# EAGLE board vga_ambilight_throughhole (EAGLE 6.1)
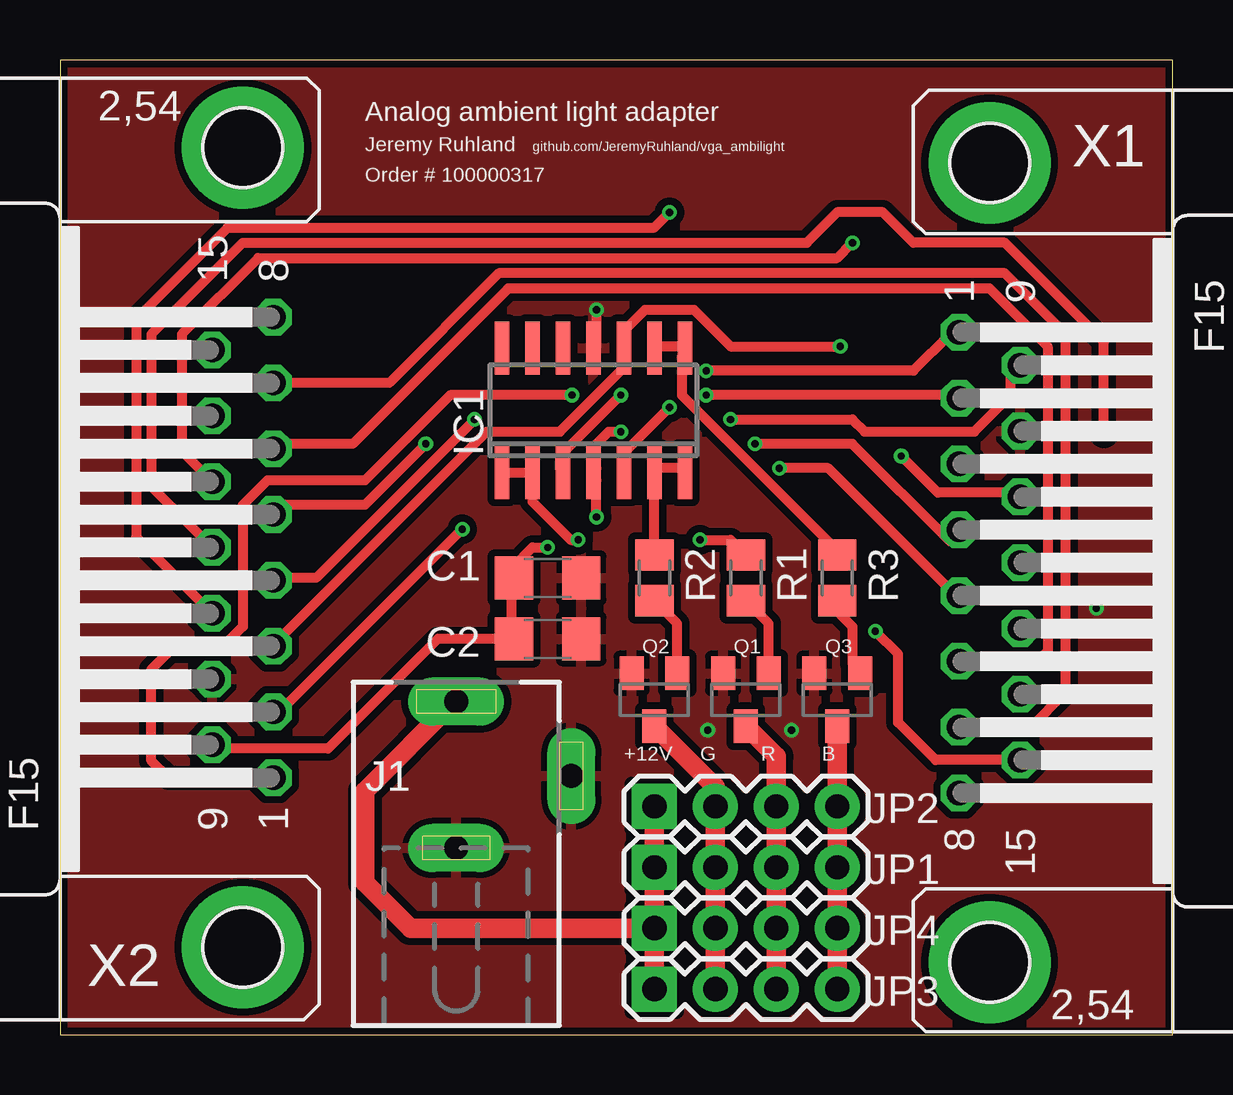
[diagram p0: board, top side]
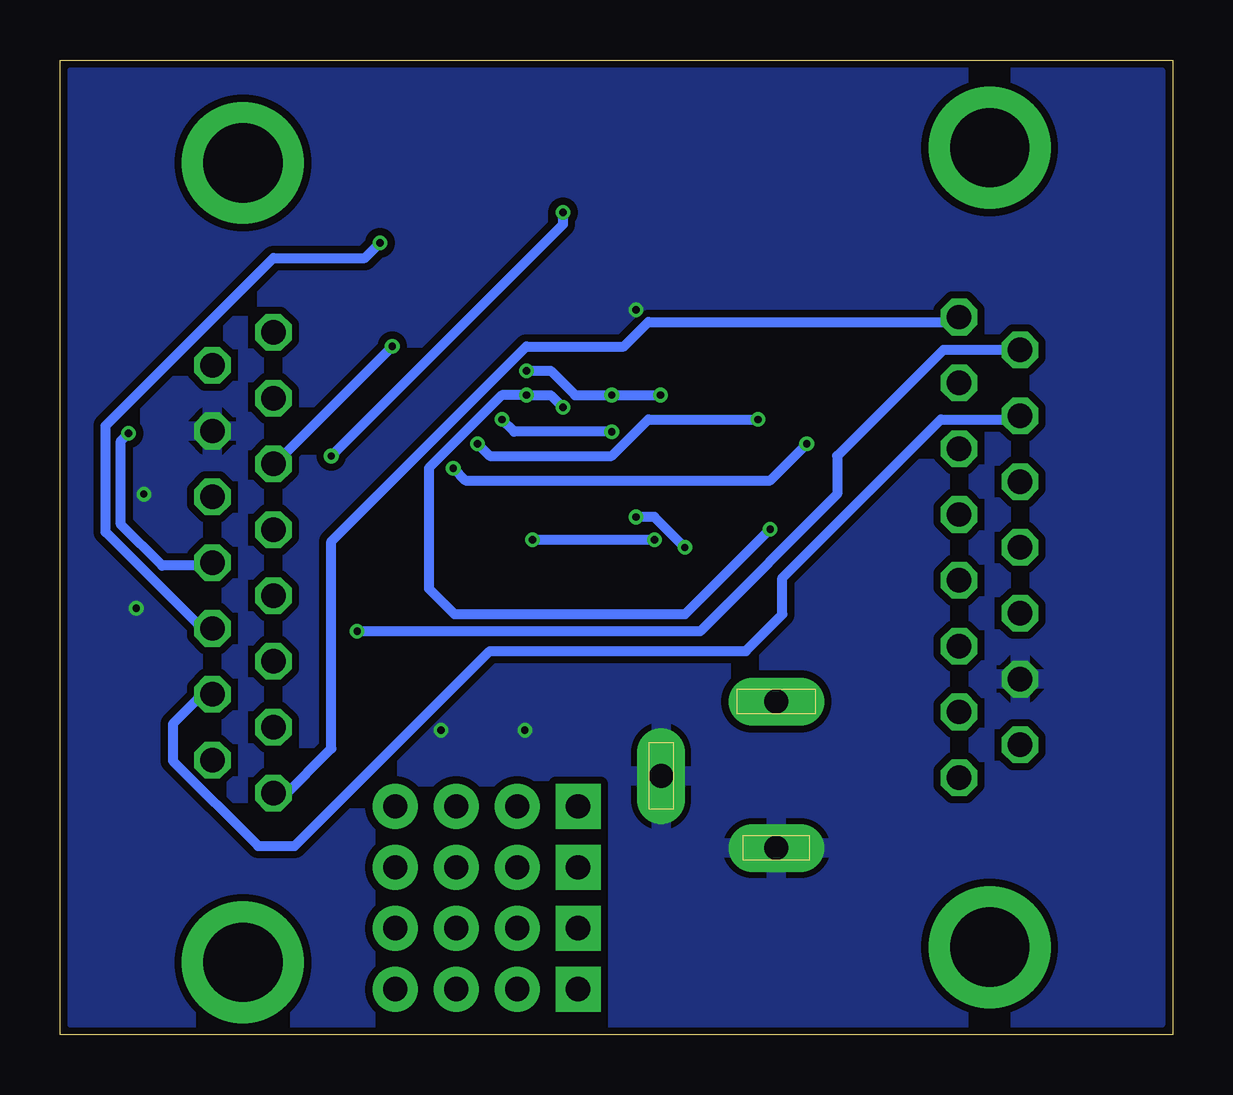
[diagram p1: board, bottom side, seen from below]

Size 46.35 x 40.64 mm. Coordinates in mm from the lower left corner, seen from the top.
Outline: 46.35,40.64 0,40.64 0,0 46.35,0 46.35,40.64
Copper layers (1*16): Top 0.035mm / dielectric 1.5mm / Bottom 0.035mm
Design rules: minimum track width 6mil, minimum drill 12mil, track to track 6mil, track to pad 6mil, pad to pad 6mil, via to via 6mil, smd to smd 0mil, copper to edge 10mil, drill to drill 10mil, minimum pad ring 10mil, minimum via ring 6mil, stop-mask expansion 2mil, vias tented up to drill 100mil, thermal gap 10mil

## Footprints (pad centres in the part's own frame; a part is rotated, then mirrored left to right if it is on the bottom)
C1206 = smd 1.6 x 1.8: 1 -1.4,0; 2 1.4,0
SO14 = smd 0.6 x 2.2: 1 -3.81,-2.6; 2 -2.54,-2.6; 3 -1.27,-2.6; 4 0,-2.6; 5 1.27,-2.6; 6 2.54,-2.6; 7 3.81,-2.6; 8 3.81,2.6; 9 2.54,2.6; 10 1.27,2.6; 11 0,2.6; 12 -1.27,2.6; 13 -2.54,2.6; 14 -3.81,2.6
DCJ0303 = drill 1 pad 2 long: 1 0,3.1; 2 4.8,0; 3 0,-3
1X04 = drill 1.016 pad 1.88 square: 1 0,0 | drill 1.016 pad 1.88: 2 2.54,0; 3 5.08,0; 4 7.62,0
SOT23 = smd 1 x 1.4: 1 -0.95,-1.1; 2 0.95,-1.1; 3 0,1.1
M0805 = smd 1.3 x 1.6: 1 -0.95,0; 2 0.95,0
F15HP = drill 1.016 octagon: 1 -9.601,-1.27; 2 -6.858,-1.27; 3 -4.115,-1.27; 4 -1.372,-1.27; 5 1.372,-1.27; 6 4.115,-1.27; 7 6.858,-1.27; 8 9.601,-1.27; 9 -8.23,1.27; 10 -5.486,1.27; 11 -2.743,1.27; 12 0,1.27; 13 2.743,1.27; 14 5.486,1.27; 15 8.23,1.27 | drill 3.302 pad 5.08: G1 -16.662,0; G2 16.662,0

## Placement (x,y rotation side)
C1  10uf  [C1206]  20.32,19.05 0 top
C2  0.1uf  [C1206]  20.32,16.51 0 top
IC1  QUAD_OPAMPD  [SO14]  22.22,26.04 0 top
J1  [DCJ0303]  16.51,10.8 0 top
JP1  [1X04]  24.77,6.98 0 top
JP2  [1X04]  24.77,9.53 0 top
JP3  [1X04]  24.77,1.91 0 top
JP4  [1X04]  24.77,4.45 0 top
Q1  [SOT23]  28.57,13.97 180 top
Q2  [SOT23]  24.77,13.97 180 top
Q3  [SOT23]  32.38,13.97 180 top
R1  [M0805]  28.57,19.05 270 top
R2  [M0805]  24.77,19.05 270 top
R3  [M0805]  32.38,19.05 270 top
X1  [F15HP]  38.73,19.69 270 top
X2  [F15HP]  7.62,20.32 90 top

## Library data of the parts
C1 C2 IC1 Q1-Q3 R1-R3 X1 X2 = adafruit
J1 = con-jack; OC_FARNELL: unknown; OC_NEWARK: unknown
JP1-JP4 = sparkfun

## Nets
+12V: J1.1 JP1.1 JP2.1 JP3.1 JP4.1
B: IC1.10 X1.3 X2.3
B_PWR: JP1.4 JP2.4 JP3.4 JP4.4 Q3.3
G: IC1.5 X1.2 X2.2
G_PWR: JP1.2 JP2.2 JP3.2 JP4.2 Q2.3
GND: C1.2 C2.2 IC1.11 J1.2 J1.3 Q1.2 Q2.2 Q3.2 X1.10 X2.10
N$1: X1.4 X2.4
N$2: X1.5 X2.5
N$3: X1.6 X2.6
N$4: X1.7 X2.7
N$5: X1.8 X2.8
N$6: IC1.8 IC1.9 R3.1
N$7: IC1.6 IC1.7 R2.1
N$8: IC1.1 IC1.2 R1.1
N$9: X1.15 X2.15
N$10: X1.14 X2.14
N$11: X1.13 X2.13
N$12: Q1.1 R1.2
N$13: Q2.1 R2.2
N$14: X1.11 X2.11
N$15: X1.12 X2.12
N$16: Q3.1 R3.2
R: IC1.3 X1.1 X2.1
R_PWR: JP1.3 JP2.3 JP3.3 JP4.3 Q1.3
VCC: C1.1 C2.1 IC1.4 X1.9 X2.9

## Tracks (layer width: path | path; a pad name or v marks a point on that pad's centre or on a via)
+12V
  Top 0.813: JP3.1 JP4.1 | JP2.1 JP1.1 JP4.1 | J1.1 16.43,13.9 12.7,10.16 12.7,6.35 14.61,4.45 JP4.1
B  (via drill 0.3)
  Top 0.406: X2.3 9.14,16.51 17.78,25.15 20.83,25.15 23.49,27.81 IC1.10 23.49,29.34 24.38,30.23 26.42,30.23 27.94,28.7 v32.51,28.7
  Bottom 0.406: v32.51,28.7 37.08,24.13 X1.3
B_PWR
  Top 0.813: JP3.4 JP4.4 JP1.4 JP2.4 Q3.3
G  (via drill 0.3)
  Top 0.406: v26.92,26.67 37.08,26.67 X1.2 | v16.76,21.08 9.14,13.46 X2.2 | v25.4,26.16 23.49,24.26 IC1.5
  Bottom 0.406: v25.4,26.16 25.91,26.67 v26.92,26.67 27.94,26.67 30.99,23.62 30.99,18.61 29.91,17.53 20.32,17.53 v16.76,21.08
G_PWR
  Top 0.813: JP3.2 JP4.2 JP1.2 JP2.2 27.3,10.33 Q2.3
GND  (via drill 0.3)
  Top 0.406: 21.84,19.05 C1.2 | v22.35,30.23 22.35,28.7 IC1.11
  other vias: 30.48,12.7 26.99,12.7 42.86,22.54 43.18,17.78
  pour Bottom (isolate 0.305): 45.72,0.64 0.64,0.64 0.64,40.01 45.72,40.01
  pour Top (isolate 0.305): 0,40.64 46.35,40.64 46.35,0 0,0
N$1  (via drill 0.3)
  Top 0.406: v17.27,25.65 10.67,19.05 9.14,19.05 X2.4 | v28.96,24.64 33.02,24.64 37.08,20.57 X1.4
  Bottom 0.406: v17.27,25.65 21.84,25.65 23.37,24.13 28.45,24.13 v28.96,24.64
N$2  (via drill 0.3)
  Top 0.406: v15.24,24.64 12.7,22.1 9.14,22.1 X2.5 | v29.97,23.62 32,23.62 37.08,18.54 X1.5
  Bottom 0.406: v15.24,24.64 16.76,23.11 29.46,23.11 v29.97,23.62
N$3
  Top 0.406: X2.6 9.14,24.64 12.19,24.64 18.67,31.12 38.73,31.12 41.15,28.7 41.15,16 40.64,15.49 37.59,15.49 X1.6
N$4
  Top 0.406: X2.7 13.72,27.18 18.29,31.75 39.37,31.75 41.91,29.21 41.91,14.29 40.45,12.83 X1.7
N$5
  Bottom 0.406: X2.8 9.14,29.72 21.84,29.72 22.86,28.7 26.92,28.7 35.05,20.57 35.05,11.94 37.08,9.91 X1.8
N$6
  Top 0.406: R3.1 32,20.57 25.91,26.67 25.91,28.19 IC1.8 25.91,28.7 24.89,28.7 IC1.9
N$7
  Top 0.406: IC1.7 25.91,23.62 24.89,23.62 IC1.6 R2.1
N$8  (via drill 0.3)
  Top 0.406: IC1.1 IC1.2 19.68,22.23 21.27,20.64 v21.59,20.64 | v26.67,20.64 27.94,20.64 R1.1
  Bottom 0.406: v21.59,20.64 v26.67,20.64
N$9  (via drill 0.3)
  Top 0.406: X1.15 36.49,11.46 34.92,13.02 34.92,15.88 v33.97,16.83
  Bottom 0.406: X2.15 9.55,28.55 13.97,24.13 13.97,22.54 19.68,16.83 v33.97,16.83
N$10
  Bottom 0.406: X2.14 6.6,25.65 9.65,25.65 16.26,19.05 16.26,17.53 17.78,16 28.45,16 36.58,7.87 38.1,7.87 41.66,11.43 41.66,12.95 40.13,14.48 X1.14
N$11  (via drill 0.3)
  Top 0.406: v33.02,33.02 32.38,32.38 8.25,32.38 5.08,29.21 5.08,24.33 X2.13
  Bottom 0.406: v33.02,33.02 33.66,32.38 37.46,32.38 44.45,25.4 44.45,20.96 40.44,16.94 X1.13
N$12
  Top 0.406: Q1.1 29.52,17.15 R1.2
N$13
  Top 0.406: Q2.1 25.71,17.15 R2.2
N$14  (via drill 0.3)
  Top 0.406: v35.05,24.13 36.58,22.61 39.62,22.61 X1.11 | v25.4,34.29 24.77,33.66 6.99,33.66 3.17,29.85 3.17,20.75 X2.11
  Bottom 0.406: v25.4,34.29 25.4,33.78 v35.05,24.13
N$15  (via drill 0.3)
  Top 0.406: X2.12 3.81,22.86 3.81,29.21 7.62,33.02 31.11,33.02 32.38,34.29 34.29,34.29 35.56,33.02 39.37,33.02 43.5,28.89 v43.5,25.08
  Bottom 0.406: X1.12 40.13,19.56 42.1,19.56 43.81,21.27 43.81,24.77 v43.5,25.08
N$16
  Top 0.406: Q3.1 33.02,15.49 33.02,17.02 32.51,17.53 R3.2
R  (via drill 0.3)
  Top 0.406: v23.37,26.67 20.83,24.13 20.83,23.62 IC1.3 | v26.92,27.69 35.56,27.69 37.08,29.21 X1.1 | v21.34,26.67 16.26,26.67 12.7,23.11 8.64,23.11 7.62,22.1 7.62,17.02 6.6,16 4.57,16 3.81,15.24 3.81,11.43 4.52,10.72 X2.1
  Bottom 0.406: v26.92,27.69 25.91,27.69 24.89,26.67 v23.37,26.67 v21.34,26.67
R_PWR
  Top 0.813: JP3.3 JP4.3 JP1.3 JP2.3 29.84,11.6 Q1.3
VCC  (via drill 0.3)
  Top 0.406: 18.8,16.51 18.8,19.05 C1.1 18.92,19.55 19.68,20.32 v20.32,20.32 | v22.35,21.59 22.35,23.11 IC1.4 22.35,23.62 22.35,24.64 22.86,25.15 v23.37,25.15 | 18.8,16.51 15.75,16.51 11.18,11.94 6.6,11.94 X2.9 | 18.8,16.51 C2.1 | v27.94,25.65 33.02,25.65 33.53,25.15 38.1,25.15 39.62,26.67 39.62,27.69 X1.9
  Bottom 0.406: v27.94,25.65 27.43,25.15 v23.37,25.15 | v20.32,20.32 21.59,21.59 v22.35,21.59

## Text on the board
_tsilk: Analog ambient light adapter | Jeremy Ruhland | github.com/JeremyRuhland/vga_ambilight | Order # 100000317 | +12V | G | R | B